# EAGLE board Codeshelf-0009 (EAGLE 5.11)
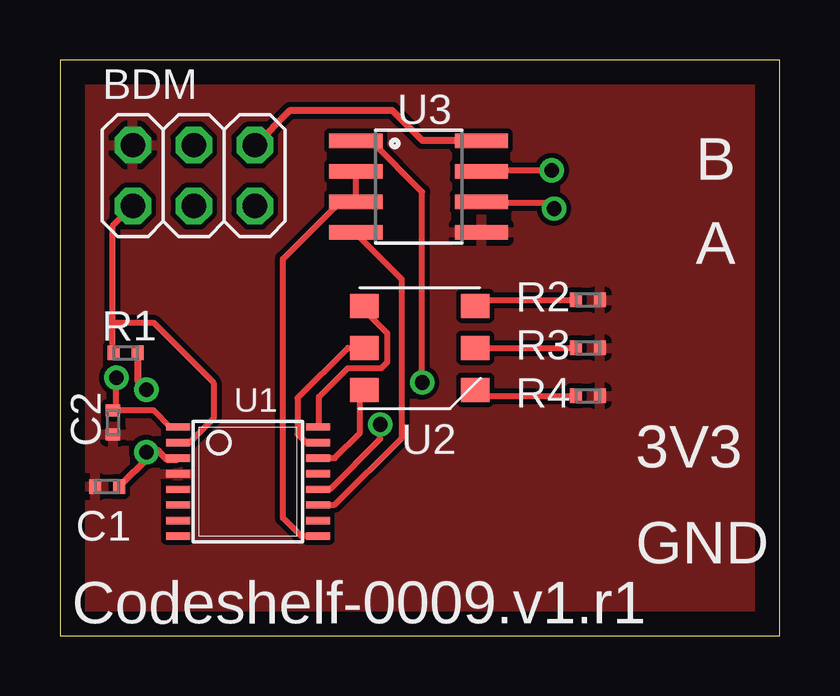
[diagram p0: board, top side]
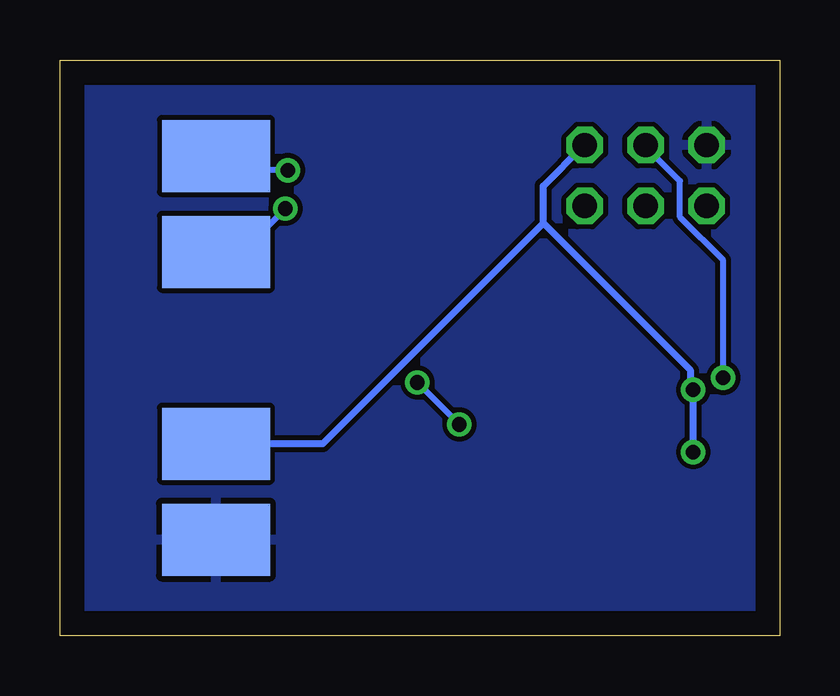
[diagram p1: board, bottom side, seen from below]

Size 30 x 24 mm. Coordinates in mm from the lower left corner, seen from the top.
Outline: 0,0 30,0 30,24 0,24 0,0
Copper layers (1*16): Top 0.035mm / dielectric 1.5mm / Bottom 0.035mm
Design rules "default": minimum track width 10mil, minimum drill 24mil, track to track 8mil, track to pad 8mil, pad to pad 8mil, via to via 8mil, smd to smd 8mil, copper to edge 40mil, drill to drill 8mil, minimum pad ring 10mil, minimum via ring 8mil, stop-mask expansion 4mil, vias tented up to drill 0mil, thermal gap 10mil
Net classes: 1 +3V3: width 0.3 mm; 2 GND: width 0.3 mm

## Footprints (pad centres in the part's own frame; a part is rotated, then mirrored left to right if it is on the bottom)
HEADER-3X2 = drill 1.016 octagon: 1 -5.08,0; 2 -5.08,2.54; 3 -2.54,0; 4 -2.54,2.54; 5 0,0; 6 0,2.54
C0402 = smd 0.5 x 0.6: 1 -0.5,0; 2 0.5,0
CONTACT-SPRING-S1761 = smd 3 x 4.5: P1 0,0
RF-R0402 = smd 0.5 x 0.6: 1 -0.5,0; 2 0.5,0
TSSOP16 = smd 0.305 x 0.991: 1 -2.275,-2.918; 2 -1.625,-2.918; 3 -0.975,-2.918; 4 -0.325,-2.918; 5 0.325,-2.918; 6 0.975,-2.918; 7 1.625,-2.918; 8 2.275,-2.918; 9 2.275,2.918; 10 1.625,2.918; 11 0.975,2.918; 12 0.325,2.918; 13 -0.325,2.918; 14 -0.975,2.918; 15 -1.625,2.918; 16 -2.275,2.918
PLCC-6 = smd 1.18 x 1: 1 -2.31,1.75; 2 -2.31,0; 3 -2.31,-1.75; 4 2.31,-1.75; 5 2.31,0; 6 2.31,1.75
SO08 = smd 0.61 x 2.21: 1 -1.905,-2.616; 2 -0.635,-2.616; 3 0.635,-2.616; 4 1.905,-2.616; 5 1.905,2.616; 6 0.635,2.616; 7 -0.635,2.616; 8 -1.905,2.616

## Placement (x,y rotation side)
BDM  HEADER-3X2  [HEADER-3X2]  8.12,17.91 0 top
C1  .1uF  [C0402]  1.96,6.21 180 top
C2  .1uF  [C0402]  2.21,8.89 90 top
J1  CONTACT-SPRING-S7071-42R  [CONTACT-SPRING-S1761]  23.5,8 270 bottom
J2  CONTACT-SPRING-S7071-42R  [CONTACT-SPRING-S1761]  23.5,20 270 bottom
J3  CONTACT-SPRING-S7071-42R  [CONTACT-SPRING-S1761]  23.5,16 270 bottom
J4  CONTACT-SPRING-S7071-42R  [CONTACT-SPRING-S1761]  23.5,4 270 bottom
R1  3.3K  [RF-R0402]  2.74,11.79 0 top
R2  3.3K  [RF-R0402]  22,14 0 top
R3  3.3K  [RF-R0402]  22,12 0 top
R4  3.3K  [RF-R0402]  22,10 0 top
U1  MC9S08QG-DT  [TSSOP16]  7.84,6.42 270 top
U2  LED5060A  [PLCC-6]  15,12 180 top
U3  RS485SOIC  [SO08]  14.95,18.72 270 top

## Library data of the parts
BDM = GW-devices
C1 C2 = GW-devices; MFGN: Murata; MFGP: GRM033R61A104KE15D; PRICE: 0.02
J1-J4 = GW-devices; MFGN: Harwin; MFGP: S1761-46R; PRICE: 0.39
R1-R4 = GW-devices; MFGN: Panasonic; MFGP: ERJ-2GEJ332X; PRICE: 0.02
U1 = GW-devices; MFGN: Freescale; MFGP: MC9S08QG8CDTER; PRICE: 1.73
U2 = GW-devices; PRICE: 0.25
U3 = SparkFun; MFGN: TI; MFGP: SN65HVD1781DR; PRICE: 4.29

## Nets
+3V3 [+3V3]: BDM.6 C1.1 J1.P1 R1.2 U1.3 U3.8
A: J3.P1 U3.6
B: J2.P1 U3.7
GND [GND]: BDM.2 C1.2 C2.1 J4.P1 R2.2 R3.2 R4.2 U1.4 U3.5
N$1: R2.1 U2.3
N$3: R3.1 U2.2
N$4: R4.1 U2.1
N$5: U1.16 U2.4
N$6: U1.15 U2.5
N$7: U1.14 U2.6
N$9: BDM.1 R1.1 U1.2
N$19: U1.9 U3.2 U3.3
N$23: BDM.4 C2.2 U1.1
RX: U1.12 U3.1
TX: U1.11 U3.4

## Tracks (layer width: path | path; a pad name or v marks a point on that pad's centre or on a via)
+3V3  (via drill 0.61)
  Top 0.3: 3.75,7.5 3.95,7.7 4.1,7.7 4.45,7.35 4.9,7.35 U1.3 | C1.1 3.75,7.5 | v3.6,10.25 3.25,10.6 3.25,11.75 R1.2 | 3.75,7.5 v3.6,7.65 | U3.8 17.55,20.65 15.1,20.65 13.85,21.9 9.6,21.9 8.15,20.45 BDM.6
  Bottom 0.3: v3.6,7.65 v3.6,10.25 3.7,10.35 3.7,11.05 9.85,17.2 | 9.85,17.2 9.85,18.75 8.15,20.45 BDM.6 | J1.P1 19.05,8 9.85,17.2
A  (via drill 0.61)
  Top 0.254: v20.6,17.8 20.35,18.05 17.6,18.05 U3.6
  Bottom 0.254: v20.6,17.8 22.4,16 J3.P1
B  (via drill 0.61)
  Top 0.254: v20.5,19.4 17.6,19.4 U3.7
  Bottom 0.254: v20.5,19.4 22.9,19.4 J2.P1
GND
  pour Bottom: 0,0 30,0 30,24 0,24
  pour Top: 0,0 30,0 30,24 0,24
N$1
  Top 0.254: R2.1 17.6,14 17.35,13.75 U2.3
N$3
  Top 0.254: U2.2 R3.1
N$4
  Top 0.254: R4.1 17.6,10 17.35,10.25 U2.1
N$5
  Top 0.254: U1.16 10.8,8.7 10.8,9.95 12,11.15 13.4,11.15 13.65,11.4 13.65,12.6 12.7,13.55 U2.4
N$6
  Top 0.254: U1.15 10.25,8.05 9.9,8.4 9.9,9.9 12,12 U2.5
N$7
  Top 0.254: U1.14 10.8,7.4 11.45,7.4 12.5,8.45 12.5,10.1 12.65,10.25 U2.6
N$9
  Top 0.254: 2.2,13.05 2.2,17.1 3,17.9 BDM.1 | 2.2,13.05 2.2,11.8 R1.1 | U1.2 4.95,8.05 5.4,8.05 6.4,9.05 6.4,10.55 3.9,13.05 2.2,13.05
N$19
  Top 0.254: U1.9 10.05,4.15 9.3,4.9 9.3,15.7 11.65,18.05 12.3,18.05 U3.3 12.35,18.2 12.35,19.35 U3.2
N$23  (via drill 0.61)
  Top 0.254: U1.1 4.9,8.7 4.6,8.7 3.9,9.4 2.25,9.4 C2.2 2.35,9.5 v2.35,10.75
  Bottom 0.254: v2.35,10.75 2.35,15.65 4.15,17.45 4.15,18.95 5.55,20.35 5.55,20.45 BDM.4
RX  (via drill 0.61)
  Top 0.254: v13.35,8.8 13.35,8.2 11.25,6.1 10.8,6.1 U1.12 | v15.1,10.55 15.1,18.5 13,20.6 12.35,20.6 U3.1
  Bottom 0.254: v13.35,8.8 v15.1,10.55
TX
  Top 0.254: U1.11 10.8,5.45 11.45,5.45 14.25,8.25 14.25,14.85 12.3,16.8 U3.4

## Text on the board
tNames: B | A | 3V3 | GND | Codeshelf-0009.v1.r1